# EAGLE board distance_sensor (EAGLE 5.06)
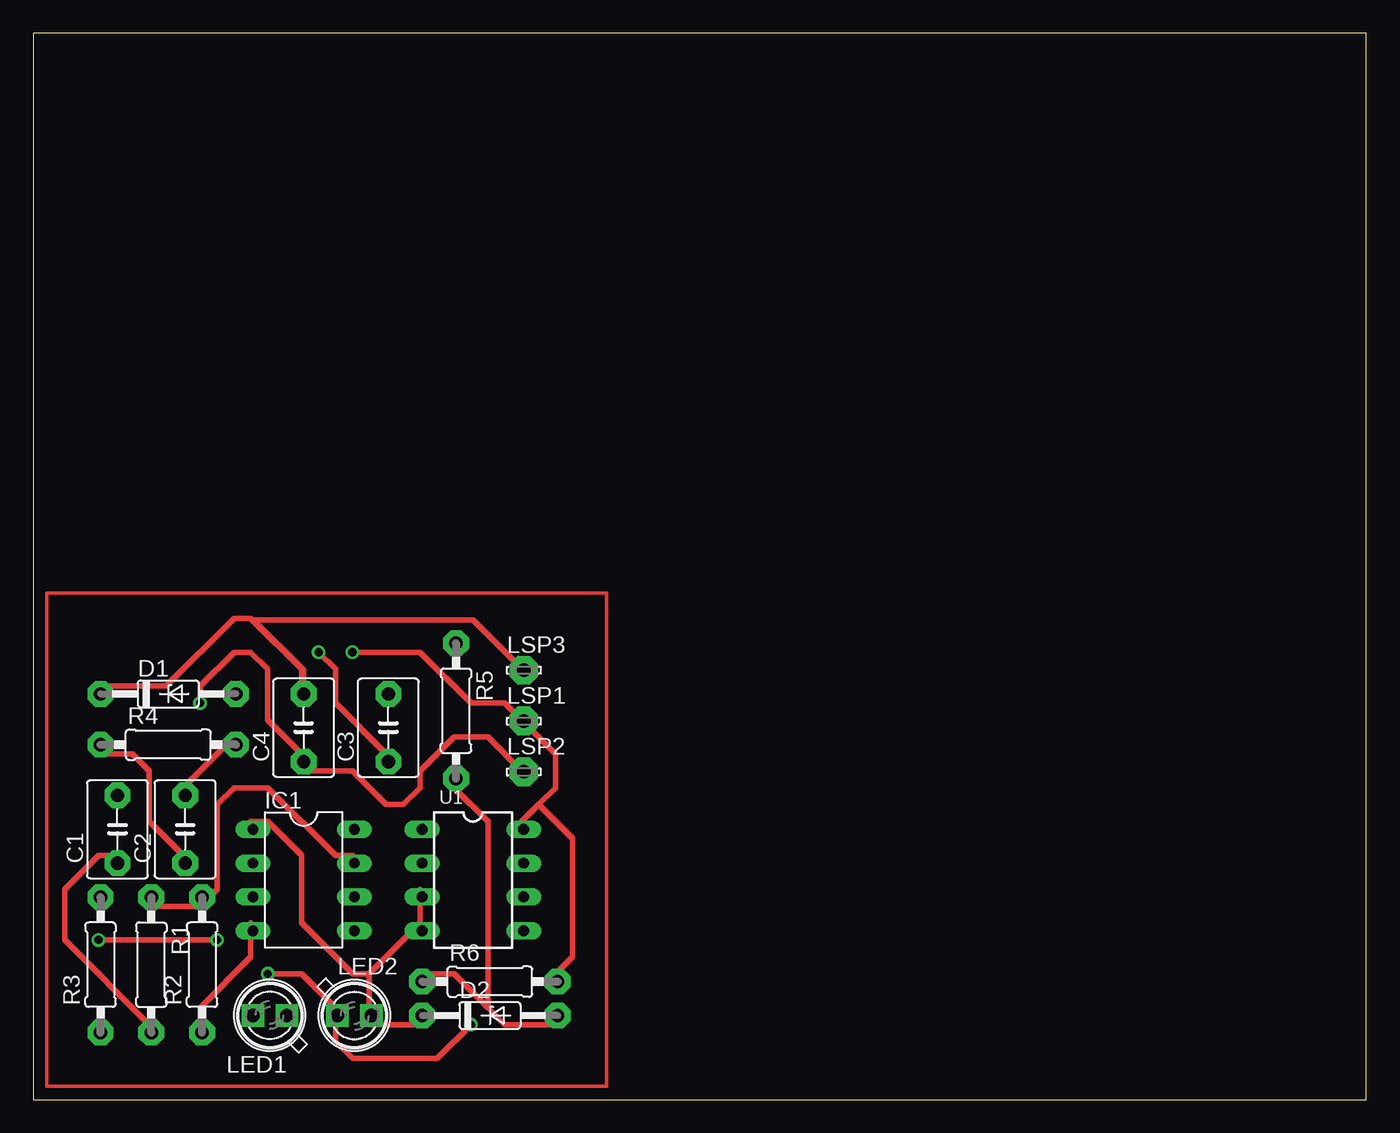
[diagram p0: board, top side]
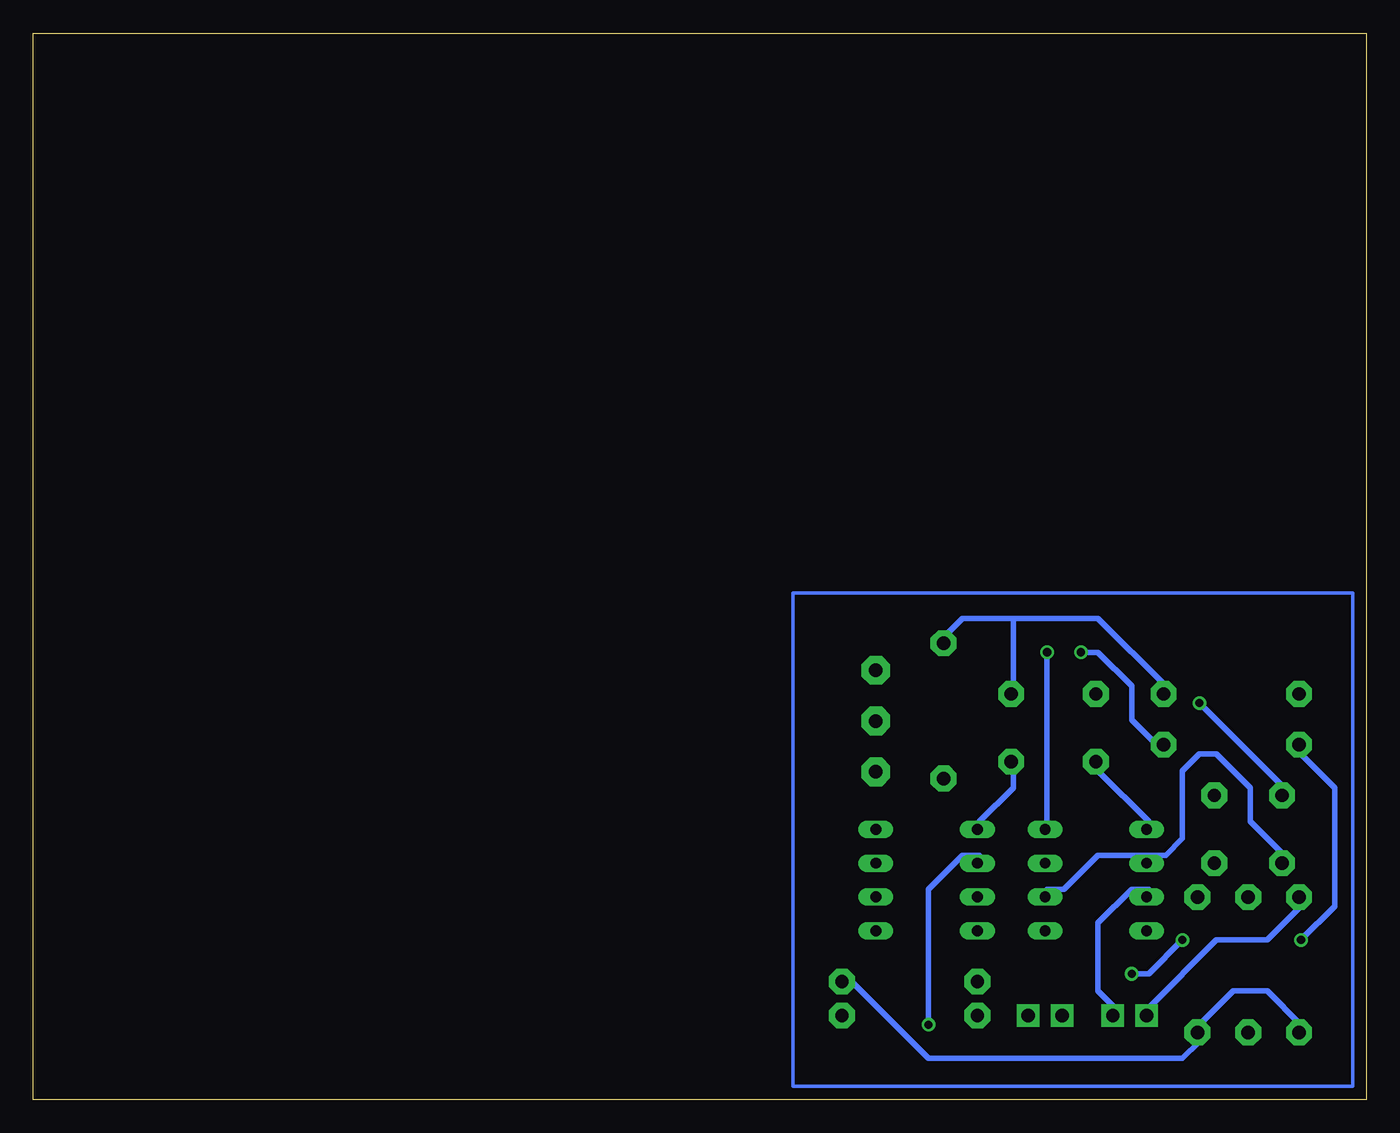
[diagram p1: board, bottom side, seen from below]

Size 100 x 80 mm. Coordinates in mm from the lower left corner, seen from the top.
Outline: 0,0 100,0 100,80 0,80 0,0
Copper layers (1*16): Top 0.035mm / dielectric 1.5mm / Bottom 0.035mm
Design rules "default *": minimum track width 16mil, minimum drill 24mil, track to track 40mil, track to pad 40mil, pad to pad 8mil, via to via 12mil, smd to smd 8mil, copper to edge 40mil, drill to drill 8mil, minimum pad ring 10mil, minimum via ring 8mil, stop-mask expansion 4mil, vias tented up to drill 0mil, thermal gap 10mil

## Footprints (pad centres in the part's own frame; a part is rotated, then mirrored left to right if it is on the bottom)
C5B4.5 = drill 1 pad 1.93 octagon: 1 -2.54,0; 2 2.54,0
DO35Z10 = drill 1 pad 1.93 octagon: A 5.08,0; C -5.08,0
DIL-08 = drill 0.813 long: 1 -3.81,-3.81; 2 -1.27,-3.81; 3 1.27,-3.81; 4 3.81,-3.81; 5 3.81,3.81; 6 1.27,3.81; 7 -1.27,3.81; 8 -3.81,3.81
SFH480 = drill 1 pad 1.676 square: A 1.27,0; K -1.27,0
LSP10 = drill 1.016 pad 2.159 octagon: MP 0,0
0207/10 = drill 1 pad 1.93 octagon: 1 -5.08,0; 2 5.08,0
DIL08 = drill 0.813 long: 1 -3.81,-3.81; 2 -1.27,-3.81; 3 1.27,-3.81; 4 3.81,-3.81; 5 3.81,3.81; 6 1.27,3.81; 7 -1.27,3.81; 8 -3.81,3.81

## Placement (x,y rotation side)
C1  [C5B4.5]  6.31,20.28 90 top
C2  [C5B4.5]  11.39,20.28 90 top
C3  [C5B4.5]  26.63,27.9 90 top
C4  [C5B4.5]  20.28,27.9 90 top
D1  DIODE  [DO35Z10]  10.12,30.44 0 top
D2  DIODE  [DO35Z10]  34.25,6.31 0 top
IC1  NE555  [DIL-08]  20.28,16.47 270 top
LED1  [SFH480]  17.74,6.31 180 top
LED2  [SFH480]  24.09,6.31 0 top
LSP1  LSP10  [LSP10]  36.79,28.4 0 top
LSP2  LSP10  [LSP10]  36.79,24.59 0 top
LSP3  LSP10  [LSP10]  36.79,32.21 0 top
R1  [0207/10]  8.85,10.12 270 top
R2  [0207/10]  12.66,10.12 90 top
R3  [0207/10]  5.04,10.12 90 top
R4  [0207/10]  10.12,26.63 0 top
R5  [0207/10]  31.71,29.17 270 top
R6  [0207/10]  34.25,8.85 0 top
U1  TL082P  [DIL08]  32.98,16.47 270 top

## Library data of the parts
C1-C4 D1 D2 LED1 LED2 R1-R6 = Sambhav
IC1 = st-microelectronics
LSP1-LSP3 = solpad
U1 = op-amp

## Nets
N$1: C3.2 D1.A R5.1
N$2: C1.1 IC1.2 IC1.6 R1.2
N$3: C1.2 C4.1 D2.C IC1.1 LED2.A LSP2.MP U1.3 U1.4
N$4: IC1.7 R1.1 R2.2
N$5: IC1.4 IC1.8 LSP1.MP R2.1 R3.1 R6.2 U1.8
N$6: LED1.A R3.2
N$7: IC1.3 LED1.K
N$10: C2.1 LED2.K R4.1 U1.2
N$11: C2.2 C3.1 R4.2 U1.1
N$13: C4.2 D1.C LSP3.MP
N$14: D2.A R5.2 R6.1

## Tracks (layer width: path | path; a pad name or v marks a point on that pad's centre or on a via)
N$1
  Bottom 0.406: 26.48,36.1 30.29,36.1 31.56,34.83 R5.1 | 26.48,36.1 20.13,36.1 15.05,31.02 D1.A | 26.48,36.1 26.48,31.02 C3.2
N$2
  Top 0.406: C1.1 6.16,18.32 4.89,18.32 2.35,15.78 2.35,11.97 8.7,5.62 R1.2
  Bottom 0.406: 16.32,18.32 20.13,18.32 22.67,15.78 23.94,15.78 IC1.6 | 16.32,18.32 15.05,18.32 13.78,19.59 13.78,24.67 12.51,25.94 11.24,25.94 8.7,23.4 8.7,20.86 6.16,18.32 C1.1 | 16.32,18.32 IC1.2
N$3  (via drill 0.61)
  Top 0.406: 29.02,13.24 29.02,15.78 U1.3 | D2.C 29.02,5.62 25.21,5.62 LED2.A 25.21,6.89 25.21,9.43 | 25.21,9.43 29.02,13.24 | 29.02,13.24 U1.4 | v12.51,29.75 12.51,31.02 15.05,33.56 16.32,33.56 17.59,32.29 17.59,28.48 20.13,25.94 C4.1 20.13,24.67 23.94,24.67 26.48,22.13 27.75,22.13 29.02,23.4 29.02,24.67 31.56,27.21 34.1,27.21 36.64,24.67 LSP2.MP | 25.21,9.43 23.94,9.43 20.13,13.24 20.13,18.32 17.59,20.86 16.32,20.86 IC1.1
  Bottom 0.406: IC1.1 16.32,20.86 20.13,24.67 C4.1 | v12.51,29.75 6.16,23.4 C1.2
N$4
  Top 0.406: 12.51,14.51 13.78,15.78 13.78,22.13 15.05,23.4 17.59,23.4 22.67,18.32 23.94,18.32 IC1.7 | 12.51,14.51 8.7,14.51 R1.1 | 12.51,14.51 R2.2
N$5  (via drill 0.61)
  Top 0.406: v23.94,33.56 29.02,33.56 32.83,29.75 35.37,29.75 36.64,28.48 | 37.91,22.13 39.18,23.4 39.18,25.94 36.64,28.48 | 37.91,22.13 36.64,20.86 U1.8 | 36.64,28.48 LSP1.MP | IC1.4 16.32,13.24 16.32,10.7 12.51,6.89 12.51,5.62 R2.1 | 37.91,22.13 40.45,19.59 40.45,10.7 39.18,9.43 R6.2
  Bottom 0.406: v23.94,33.56 23.94,20.86 IC1.8 | R3.1 4.89,5.62 7.43,8.16 9.97,8.16 12.51,5.62 R2.1 12.51,4.35 13.78,3.08 32.83,3.08 39.18,9.43 R6.2
N$6
  Bottom 0.406: LED1.A 16.32,6.89 11.24,11.97 7.43,11.97 4.89,14.51 R3.2
N$7
  Bottom 0.406: IC1.3 16.32,15.78 17.59,15.78 20.13,13.24 20.13,8.16 18.86,6.89 LED1.K
N$8
  Bottom 0.254: 1,38 43,38 43,1 1,1 1,38
N$9
  Top 0.254: 1,38 43,38 43,1 1,1 1,38
N$10  (via drill 0.61)
  Top 0.406: C2.1 11.24,18.32 8.7,20.86 8.7,24.67 7.43,25.94 4.89,25.94 R4.1 | v32.83,5.62 30.29,3.08 23.94,3.08 22.67,4.35 22.67,5.62 LED2.K 22.67,6.89 20.13,9.43 v17.59,9.43 | v4.89,11.97 v13.78,11.97
  Bottom 0.406: v32.83,5.62 32.83,15.78 30.29,18.32 29.02,18.32 U1.2 | v4.89,11.97 2.35,14.51 2.35,23.4 4.89,25.94 R4.1 | v13.78,11.97 16.32,9.43 v17.59,9.43
N$11  (via drill 0.61)
  Top 0.406: C2.2 11.24,23.4 15.05,27.21 R4.2 | v21.4,33.56 22.67,32.29 22.67,29.75 26.48,25.94 C3.1
  Bottom 0.406: U1.1 29.02,20.86 26.48,23.4 26.48,24.67 C3.1 | v21.4,33.56 20.13,33.56 17.59,31.02 17.59,28.48 15.05,25.94 R4.2
N$13
  Top 0.406: D1.C 4.89,31.02 9.97,31.02 15.05,36.1 16.32,36.1 20.13,32.29 20.13,31.02 C4.2 20.28,32.22 16.5,36 33,36 LSP3.MP
N$14
  Top 0.406: 34.1,6.89 31.56,9.43 29.02,9.43 R6.1 | 34.1,6.89 35.37,5.62 39.18,5.62 D2.A | 34.1,6.89 34.1,20.86 31.56,23.4 R5.2